# Altium PCB F-T-V Converter PCB.PcbDoc
Units mm, origin at the board's own origin, x right, y up, seen from the top; angles counter-clockwise.
Board outline 25 x 85 mm, 2 copper layers (Top Layer, Bottom Layer); 17 components, 11 nets, 41 pads, 0 vias.
Unrouted connection lines stored in the file: 2.
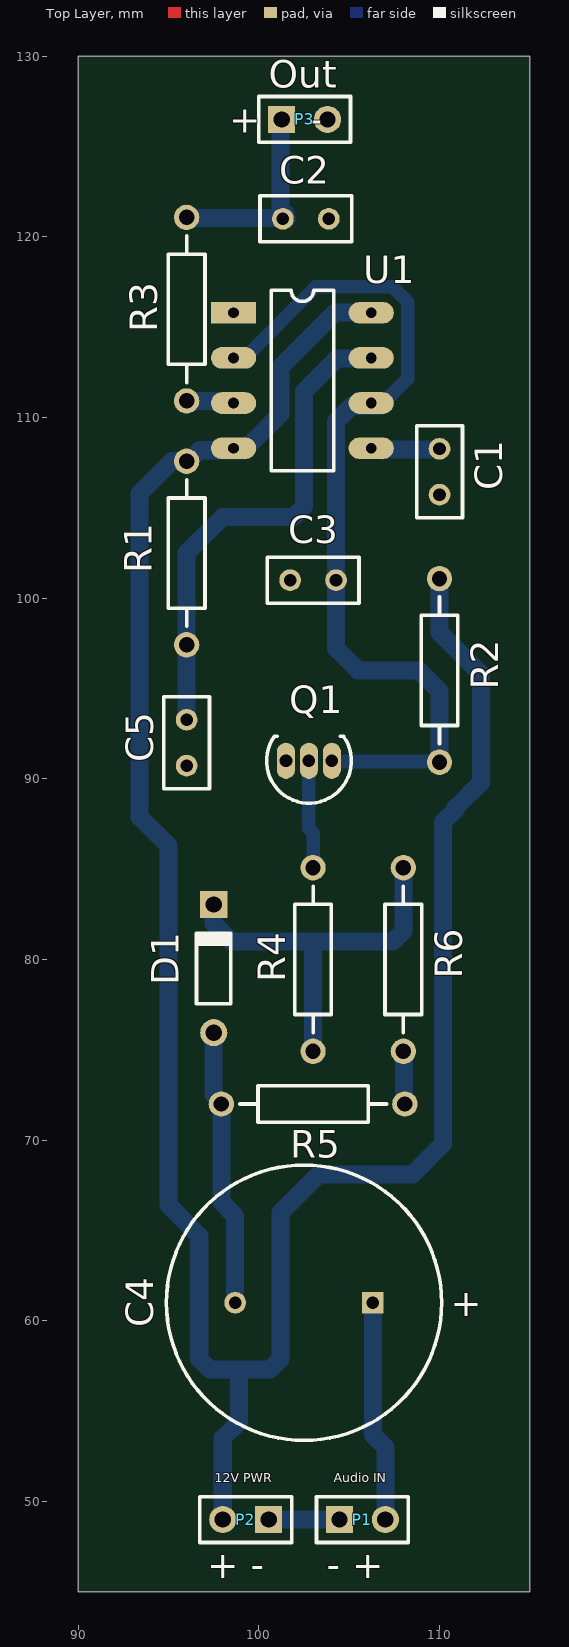
[diagram p0: Top Layer view]
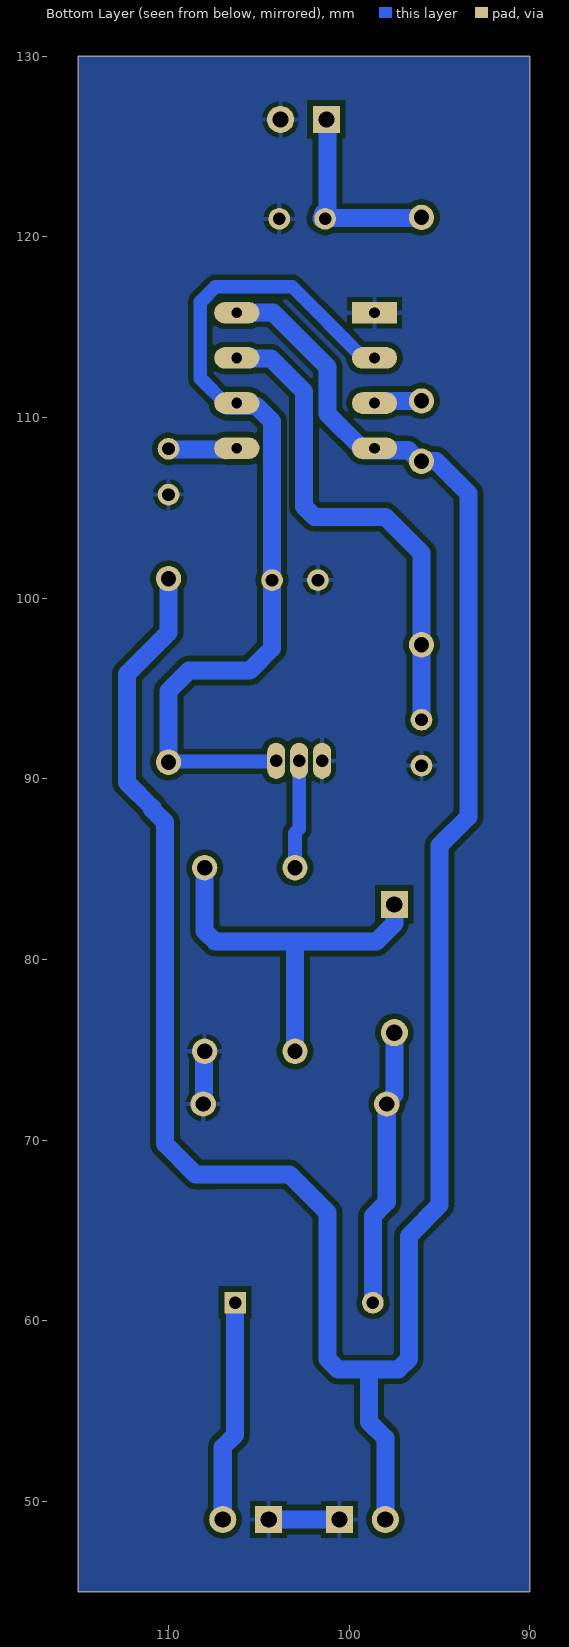
[diagram p1: Bottom Layer view, seen from below]
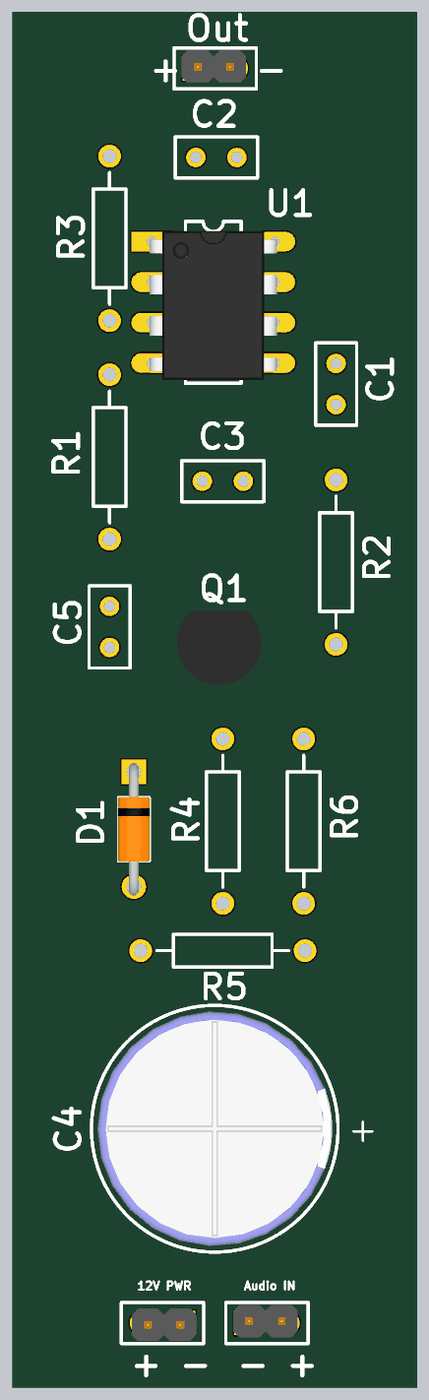
[diagram p2: 3D render of the assembled board from above, using the file's embedded part models]

## Layer stack, top to bottom
Top Solder: solder mask 0.0102, Solder Resist, Dk 3.5
Top Layer: signal copper 0.0356
Dielectric 1: dielectric 0.32, FR-4, Dk 4.8
Bottom Layer: signal copper 0.0356
Bottom Solder: solder mask 0.0102, Solder Resist, Dk 3.5

## Board outline
90,130 115,130 115,45 90,45

## Design rules (kind name [scope] priority, off if disabled: settings)
Clearance [All] p1: gap=0.3 ignorepadtopadclearanceinfootprint=FALSE
PolygonConnect [All] p1: connectstyle=Relief reliefconductorwidth=0.254 reliefentries=4 polygonreliefangle="90 Angle" airgapwidth=0.254
RoutingVias [All] p1: holewidth=0.711 width=1.27 viastyle="Through Hole" minholewidth=0.711 minwidth=1.27 maxholewidth=0.711 maxwidth=1.27
SolderMaskExpansion [All] p1: expansion=0.102 istentingtop=FALSE
Width [All] p1: maxlimit=1.5 minlimit=0.3 preferedwidth=0.6
30 further rules are at their usual default settings.

## Components (designator, comment, footprint, x,y, rotation, side; value= is the part's Value field where it differs from the comment)
C1 "0.01uF" RAD-0.1 110,107 r270 top
C2 "0.022uF" RAD-0.1 102.6,121 r180 top
C3 "0.022uF" RAD-0.1 103,101 r0 top
C4 "47uF" RB7.6-15 102.5,61 r0 top
C5 "0.022uF" RAD-0.1 96,92 r90 top
D1 "1N4148" DO-35 97.5,79.5 r90 top
P1 "Audio" HDR1X2 104.46,49 r0 top
P2 "Power" HDR1X2 100.54,49 r180 top
P3 "Out" HDR1X2 101.26,126.5 r0 top
Q1 "BC337" TO-92 102.77,91 r90 top
R1 "47K" AXIAL-0.4 96,102.5 r90 top
R2 "15K" AXIAL-0.4 110,96 r90 top
R3 "4K7" AXIAL-0.4 96,116 r90 top
R4 "47K" AXIAL-0.4 103,80 r90 top
R5 "1K" AXIAL-0.4 103,72 r180 top
R6 "47K" AXIAL-0.4 108,80 r90 top
U1 "NE555P" NE555 98.6,115.8 r0 top

## Footprints (in the part's own frame and the unit in brackets; to place one, negate y for a bottom-side part, rotate by r counter-clockwise, add the part's x,y. Pads: shape width x height; smd on the part's side, far side on the other; paste and mask are expansions set on the pad)
AXIAL-0.4 [mm] "Axial Device, Thru-Hole; 2 Leads; 0.4 in Pin Spacing"
  round 1.4 hole 0.85: 1(-5.08,0) 2(5.08,0)
  silkscreen extent -4.06,-1.02 4.06,1.02, body extent -5.3,-1.15 5.3,1.15, height 2.5
DO-35 [mm] "Diode, Axial; Body 3.8 x 1.9 mm (LxDia. max), Lead Dia. 0.53 mm (max)"
  round 1.5 hole 0.9: 1(-3.55,0)
  rect 1.5x1.5 hole 0.9: 2(3.55,0)
  silkscreen extent -1.95,-0.95 2.05,0.95, body extent -4.11,-1 4.11,1, height 3
HDR1X2 [mm] "Connector; Header; 2 Position"
  rect 1.5x1.5 hole 0.9: 1(0,0)
  round 1.5 hole 0.9: 2(2.54,0)
  silkscreen extent -1.27,-1.27 3.81,1.27, body extent -0.82,-0.89 3.17,1.11, height 5.5
NE555 [mm]
  rect 2.5x1.2 hole 0.6: 1(0,0)
  oval 2.5x1.2 hole 0.6: 2(0,-2.5) 3(0,-5) 4(0,-7.5) 5(7.62,-7.5) 6(7.62,-5) 7(7.62,-2.5) 8(7.62,0)
  silkscreen extent 2.08,-8.75 5.54,1.25, body extent -0.13,-8.54 7.75,0.67, height 4.6
RAD-0.1 [mm] "Radial Cap, Thru-Hole; 2 Leads; 0.1 in Pin Spacing"
  round 1.2 hole 0.7: 1(-1.27,0) 2(1.27,0)
  silkscreen extent -2.54,-1.27 2.54,1.27, body extent -2.4,-1.36 2.29,1.14, height 11.35
RB7.6-15 [mm] "Polarized Capacitor (Radial); 2 Leads"
  rect 1.2x1.2 hole 0.7: 1(3.81,0)
  round 1.2 hole 0.7: 2(-3.81,0)
  silkscreen extent -7.62,-7.62 7.62,7.62, body extent -7.25,-7.25 7.26,7.25, height 2
TO-92 [mm] "TO, Flat Index; 3 In-Line, Axial Leads; Body Dia. 4.6mm; Leads 0.41 x 0.39 mm (max)"
  oval 2x1 hole 0.7: 1(0,1.27) 2(0,0) 3(0,-1.27)
  silkscreen extent -2.34,-2.34 1.35,2.34, body extent -2.59,-2.62 2.03,2.62, height 8.2

## Part data
C1: library part Cap, "Capacitor: ceramic; MLCC, monolithic; 10nF; 100V; X7R; ±10%; THT", Capacitance=10nF, Case/Package=Radial, Dielectric=X7R, Dielectric Material=Ceramic, Manufacturer=KEMET, Manufacturer Part Number=C315C103K1R5TA, Max Operating Temperature=125°C, Min Operating Temperature=-55°C, Package Quantity=2500, Supplier Part Number 1=399-4147-ND, Tolerance=10%, Voltage=100V, Category="Ceramic Capacitors", ComponentLink1Description=https://datasheet.ciiva.com/11786/0900766b80717e24-11786801.pdf?src-supplier=RSComponents, ComponentLink1URL=https://datasheet.ciiva.com/11786/0900766b80717e24-11786801.pdf?src-supplier=RSComponents, ComponentLink2Description=https://datasheet.ciiva.com/5904/f3101-goldmax-5904939.pdf?src-supplier=Farnell, ComponentLink2URL=https://datasheet.ciiva.com/5904/f3101-goldmax-5904939.pdf?src-supplier=Farnell, ComponentLink3Description=https://datasheet.ciiva.com/18102/getdatasheetpartid-77390-18102811.pdf?src-supplier=Verical, ComponentLink3URL=https://datasheet.ciiva.com/18102/getdatasheetpartid-77390-18102811.pdf?src-supplier=Verical, ComponentLink4Description=https://datasheet.ciiva.com/39122/f3101-goldmax-39122972.pdf?src-supplier=Onlinecomponents.com, ComponentLink4URL=https://datasheet.ciiva.com/39122/f3101-goldmax-39122972.pdf?src-supplier=Onlinecomponents.com, ComponentLink5Description=https://datasheet.ciiva.com/5389/f3101-goldmax-5389838.pdf?src-supplier=Mouser, ComponentLink5URL=https://datasheet.ciiva.com/5389/f3101-goldmax-5389838.pdf?src-supplier=Mouser, Construction=RADIAL, Depth=2.54mm, Dissipation Factor=2.5%, Height=2.54mm, Height - Seated (Max)=0.21inch, LatestRevisionDate=17-Jul-2002, LatestRevisionNote="Re-released for DXP Platform.", Lead Diameter=0.51mm, Lead Free="Lead Free", Lead Length=7mm, Lead Pitch=2.54mm, Lead/Base Style=Straight, Length=3.81mm, Mount="Through Hole,PCB", Number of Pins=2, PackageDescription="Radial Cap, Thru-Hole; 2 Leads; 0.3 in Pin Spacing", PackageReference=RAD-0.3, Packaging=Bulk, Pricing 1="1=0.26000, 10=0.17800, 50=0.11880, 100=0.10100, 500=0.07128, 1000=0.06237, 2500=0.05940, 5000=0.05494 (USD)", Published=8-Jun-2000, Publisher="Altium Limited", Radiation Hardening=No, REACH SVHC="No SVHC", RoHS=Yes, RoHS Compliant=Yes, Series="GoldMax 300 Comm X7R", Stock 1=32763, Supplier 1=Digi-Key, Termination=Radial, Voltage Rating=100V, Voltage Rating (DC)=100V, Width=3.81mm
C2 C3 C5: library part Cap, "Cap Ceramic 0.022uF 50V Z5U 20% Radial 5.08mm 85C T/R", Capacitance=22nF, Case/Package=Radial, Dielectric=Z5U, Manufacturer=KEMET, Manufacturer Part Number=C317C223M5U5TA7301, Max Operating Temperature=85°C, Min Operating Temperature=-10°C, Supplier Part Number 1=399-14073-1-ND, Tolerance=20%, Voltage Rating=50V, Category="Ceramic Capacitors", ComponentLink1Description=https://datasheet.ciiva.com/32431/c052-62-mlcc-series-eng-tds-32431014.pdf?src-supplier=Distrelec, ComponentLink1URL=https://datasheet.ciiva.com/32431/c052-62-mlcc-series-eng-tds-32431014.pdf?src-supplier=Distrelec, LatestRevisionDate=17-Jul-2002, LatestRevisionNote="Re-released for DXP Platform.", Lead Pitch=5.08mm, Lead/Base Style="Formed Leads", Length=3.8mm, Mount="Through Hole", PackageDescription="Radial Cap, Thru-Hole; 2 Leads; 0.3 in Pin Spacing", PackageReference=RAD-0.3, Packaging="Tape and Reel", Pitch=5.08mm, Pricing 1="1=0.37000, 10=0.25100, 50=0.16720, 100=0.14210, 500=0.10032, 1000=0.08778 (USD)", Pricing 2="1=0.82000, 10=0.57700, 50=0.43640, 100=0.38020, 500=0.28160, 1000=0.23936 (USD)", Published=8-Jun-2000, Publisher="Altium Limited", Radiation Hardening=No, RoHS=Yes, RoHS Compliant=Yes, Series="GoldMax 300 Comm Z5U", Stock 1=5732, Stock 2=1856, Supplier 1=Digi-Key, Supplier 2=Digi-Key, Supplier Part Number 2=445-175388-1-ND, Termination=Radial, Width=2.54mm
C4: library part "Cap Pol1", "Cap Aluminum 47uF 16V 20% Radial Aluminum Cylindrical Can 2mm 155mA 5000 hr 105°C Ammo Pack", Case/Package=Radial, Manufacturer=Nichicon, Manufacturer Part Number=UPV1C470MFD1TD, Max Operating Temperature=105°C, Min Operating Temperature=-55°C, Package Quantity=2000, Ripple Current=155mA, Supplier Part Number 1=493-11656-1-ND, Tolerance=20%, Voltage Rating=16V, Capacitance=47uF, Category="Aluminum Electrolytic Capacitors", ComponentLink1Description=https://datasheet.ciiva.com/29544/e-pv-29544776.pdf?src-supplier=Digi-Key, ComponentLink1URL=https://datasheet.ciiva.com/29544/e-pv-29544776.pdf?src-supplier=Digi-Key, ComponentLink2Description=https://datasheet.ciiva.com/29544/e-pv-29544777.pdf?src-supplier=Digi-Key, ComponentLink2URL=https://datasheet.ciiva.com/29544/e-pv-29544777.pdf?src-supplier=Digi-Key, Height - Seated (Max)=0.492inch, Impedance=1.4R, LatestRevisionDate=17-Jul-2002, LatestRevisionNote="Re-released for DXP Platform.", Lead Pitch=0.079inch, Life (Hours)=5000Hour, Mount="Through Hole", PackageDescription="Polarized Capacitor (Radial); 2 Leads", PackageReference=RB7.6-15, Packaging="Tape and Reel", Pricing 1="1=0.47000, 10=0.32800, 50=0.22980, 100=0.19700, 500=0.14776, 1000=0.12477 (USD)", Published=8-Jun-2000, Publisher="Altium Limited", RoHS=Yes, RoHS Compliant=Yes, Stock 1=1934, Supplier 1=Digi-Key
D1: library part "Diode 1N4148", "High Conductance Fast Diode", Code_JEDEC=DO-204-AH, ComponentLink1Description="Manufacturer Link", ComponentLink1URL=http://www.fairchildsemi.com/, ComponentLink2Description=Datasheet, ComponentLink2URL=http://www.fairchildsemi.com/ds/1N%2F1N4148.pdf, DatasheetVersion=1997, LatestRevisionDate=17-Jul-2002, LatestRevisionNote="Re-released for DXP Platform.", PackageDescription="Diode, Axial; Body 3.8 x 1.9 mm (LxDia. max), Lead Dia. 0.53 mm (max)", PackageReference=DO-35, Published=8-Jun-2000, Publisher="Altium Limited"
P1 P2 P3: library part MHDR1X2, "Header, 2-Pin", LatestRevisionDate=17-Jul-2002, LatestRevisionNote="Re-released for DXP Platform.", Publisher="Altium Limited"
Q1: library part NPN, "Trans GP BJT NPN 45V 0.8A 3-Pin TO-92 Bulk", Case/Package=TO-92, Collector Base Voltage (VCBO)=50V, Collector Emitter Breakdown Voltage=45V, Collector Emitter Saturation Voltage=700mV, Current Rating=800mA, Emitter Base Voltage (VEBO)=5V, Frequency=100MHz, Manufacturer="ON Semiconductor / Fairchild", Manufacturer Part Number=BC33725BU, Max Operating Temperature=150°C, Max Power Dissipation=625mW, Min Operating Temperature=-55°C, Package Quantity=1000, Supplier Part Number 1=BC33725BU-ND, Category=BJTs, Code_JEDEC=TO-226-AA, Collector Emitter Voltage (VCEO)=45V, ComponentLink1Description=https://datasheet.ciiva.com/972/bc337-972224.pdf?src-supplier=Digi-Key, ComponentLink1URL=https://datasheet.ciiva.com/972/bc337-972224.pdf?src-supplier=Digi-Key, ComponentLink2Description=https://datasheet.ciiva.com/15138/getdatasheetpartid-60357-15138928.pdf?src-supplier=Verical, ComponentLink2URL=https://datasheet.ciiva.com/15138/getdatasheetpartid-60357-15138928.pdf?src-supplier=Verical, ComponentLink3Description=https://datasheet.ciiva.com/26229/bc338-26229799.pdf?src-supplier=Avnet+Europe, ComponentLink3URL=https://datasheet.ciiva.com/26229/bc338-26229799.pdf?src-supplier=Avnet+Europe, ComponentLink4Description=https://datasheet.ciiva.com/11205/bc338-11205913.pdf?src-supplier=Avnet, ComponentLink4URL=https://datasheet.ciiva.com/11205/bc338-11205913.pdf?src-supplier=Avnet, ComponentLink5Description=https://datasheet.ciiva.com/16918/bc337-16918877.pdf?src-supplier=Future+Electronics, ComponentLink5URL=https://datasheet.ciiva.com/16918/bc337-16918877.pdf?src-supplier=Future+Electronics, Contact Plating=Tin,Matte, Element Configuration=Single, Gain Bandwidth Product=100MHz, Height=4.58mm, hFE Min=100, LatestRevisionDate=17-Jul-2002, LatestRevisionNote="Re-released for DXP Platform.", Lead Free="Lead Free", Length=4.58mm, Max Collector Current=800mA, Max Frequency=100MHz, Mount="Through Hole", Number of Elements=1, Number of Pins=3, PackageDescription="TO, Flat Index; 3 In-Line, Axial Leads; Body Dia. 4.8mm; Leads 0.55 x 0.51 mm (max)", PackageReference=TO-226-AA, Packaging=Bulk, Polarity=NPN, Power Dissipation=625mW, Pricing 1="1=0.32000, 10=0.22000, 25=0.20720, 100=0.10730, 500=0.08948, 1000=0.06217, 2500=0.05388, 5000=0.04998, 9000=0.04145 (USD)", Published=8-Jun-2000, Publisher="Altium Limited", Radiation Hardening=No, REACH SVHC="No SVHC", RoHS=Yes, RoHS Compliant=Yes, Stock 1=7685, Supplier 1=Digi-Key, Transition Frequency=100MHz, Voltage Rating (DC)=45V, Weight=0.179g, Width=3.86mm
R1 R4 R6: library part Res2, "RES 47K OHM 1/4W 5% AXIAL", Case/Package=Conformal, Manufacturer="Stackpole Electronics", Manufacturer Part Number=CF14JT47K0, Max Operating Temperature=155°C, Max Power Dissipation=250mW, Min Operating Temperature=-55°C, Package Quantity=1, Resistance=47kR, Resistor Type="Carbon Film", Supplier Part Number 1=CF14JT47K0CT-ND, Temperature Coefficient=0ppm/°C, Tolerance=5%, Working Voltage=350V, Category="Through-Hole Resistors", ComponentLink1Description=https://www.verical.com/server-webapp/html/getDatasheet?partID=364248&src-supplier=Verical, ComponentLink1URL=https://www.verical.com/server-webapp/html/getDatasheet?partID=364248&src-supplier=Verical, ComponentLink2Description=https://www.seielect.com/catalog/SEI-CF_CFM.pdf?src-supplier=Avnet, ComponentLink2URL=https://www.seielect.com/catalog/SEI-CF_CFM.pdf?src-supplier=Avnet, ComponentLink3Description=http://www.seielect.com/Catalog/SEI-CF_CFM.pdf?src-supplier=Future+Electronics, ComponentLink3URL=http://www.seielect.com/Catalog/SEI-CF_CFM.pdf?src-supplier=Future+Electronics, ComponentLink4Description=https://www.seielect.com/catalog/SEI-Packaging.pdf?src-supplier=Digi-Key, ComponentLink4URL=https://www.seielect.com/catalog/SEI-Packaging.pdf?src-supplier=Digi-Key, ComponentLink5Description=http://components.arrow.com/part/dataview/27620275S9848655N1174?src-supplier=Arrow+Electronics, ComponentLink5URL=http://components.arrow.com/part/dataview/27620275S9848655N1174?src-supplier=Arrow+Electronics, Construction=Cylindrical, Contact Plating=Tin,Matte, Diameter=2.3mm, Features="Flame Retardant Coating", LatestRevisionDate=17-Jul-2002, LatestRevisionNote="Re-released for DXP Platform.", Lead Free="Lead Free", Length=6.5mm, Military Standard=Not, Mount="Through Hole,Axial", Number of Terminations=2, PackageDescription="Axial Device, Thru-Hole; 2 Leads; 0.4 in Pin Spacing", PackageReference=AXIAL-0.4, Packaging="Tape and Reel", Power Rating=250mW, Pricing 1="1=0.10000, 10=0.03600, 25=0.02640, 50=0.02000, 100=0.01480, 250=0.01124, 500=0.00900, 1000=0.00662 (USD)", Published=8-Jun-2000, Publisher="Altium Limited", Radiation Hardening=No, RoHS=Yes, RoHS Compliant=Yes, Series=CF, Stock 1=174171, Supplier 1=Digi-Key, Technology="CARBON FILM", Termination=Axial
R2: library part Res2, "General Type Carbon Film Resistor 15kOhm 1/4W 5% Axial Bulk", Case/Package=Conformal, Manufacturer="Stackpole Electronics", Manufacturer Part Number=CF14JT47K0, Max Operating Temperature=155°C, Max Power Dissipation=250mW, Min Operating Temperature=-55°C, Package Quantity=1, Resistance=47kR, Resistor Type="Carbon Film", Supplier Part Number 1=CF14JT47K0CT-ND, Temperature Coefficient=0ppm/°C, Tolerance=5%, Working Voltage=350V, Category="Through-Hole Resistors", ComponentLink1Description=https://www.verical.com/server-webapp/html/getDatasheet?partID=364248&src-supplier=Verical, ComponentLink1URL=https://www.verical.com/server-webapp/html/getDatasheet?partID=364248&src-supplier=Verical, ComponentLink2Description=https://www.seielect.com/catalog/SEI-CF_CFM.pdf?src-supplier=Avnet, ComponentLink2URL=https://www.seielect.com/catalog/SEI-CF_CFM.pdf?src-supplier=Avnet, ComponentLink3Description=http://www.seielect.com/Catalog/SEI-CF_CFM.pdf?src-supplier=Future+Electronics, ComponentLink3URL=http://www.seielect.com/Catalog/SEI-CF_CFM.pdf?src-supplier=Future+Electronics, ComponentLink4Description=https://www.seielect.com/catalog/SEI-Packaging.pdf?src-supplier=Digi-Key, ComponentLink4URL=https://www.seielect.com/catalog/SEI-Packaging.pdf?src-supplier=Digi-Key, ComponentLink5Description=http://components.arrow.com/part/dataview/27620275S9848655N1174?src-supplier=Arrow+Electronics, ComponentLink5URL=http://components.arrow.com/part/dataview/27620275S9848655N1174?src-supplier=Arrow+Electronics, ComponentLink6Description=http://www.yageo.com/NewPortal/yageodocoutput?fileName=/pdf/throughhole/Yageo_LR_CFR_2013.pdf&src-supplier=Digi-Key, ComponentLink6URL=http://www.yageo.com/NewPortal/yageodocoutput?fileName=/pdf/throughhole/Yageo_LR_CFR_2013.pdf&src-supplier=Digi-Key, Construction=Cylindrical, Contact Plating=Tin,Matte, Diameter=2.3mm, Features="Flame Retardant Coating", LatestRevisionDate=17-Jul-2002, LatestRevisionNote="Re-released for DXP Platform.", Lead Free="Lead Free", Length=6.5mm, Military Standard=Not, Mount="Through Hole,Axial", Number of Terminations=2, PackageDescription="Axial Device, Thru-Hole; 2 Leads; 0.4 in Pin Spacing", PackageReference=AXIAL-0.4, Packaging="Tape and Reel", Power Rating=250mW, Pricing 1="1=0.10000, 10=0.03600, 25=0.02640, 50=0.02000, 100=0.01480, 250=0.01124, 500=0.00900, 1000=0.00662 (USD)", Pricing 2="1=0.10000, 10=0.06700, 25=0.04640, 50=0.03600, 100=0.02580, 250=0.02008, 500=0.01596, 1000=0.01133, 5000=0.00876 (USD)", Published=8-Jun-2000, Publisher="Altium Limited", Radiation Hardening=No, RoHS=Yes, RoHS Compliant=Yes, Series=CF, Stock 1=174171, Stock 2=39195, Supplier 1=Digi-Key, Supplier 2=Digi-Key, Supplier Part Number 2=15KQBK-ND, Technology="CARBON FILM", Termination=Axial
R3: "RES 4.7K OHM 1/4W 5% AXIAL", Case/Package=Conformal, Manufacturer="Stackpole Electronics", Manufacturer Part Number=CF14JT47K0, Max Operating Temperature=155°C, Max Power Dissipation=250mW, Min Operating Temperature=-55°C, Package Quantity=1, Resistance=47kR, Resistor Type="Carbon Film", Supplier Part Number 1=CF14JT47K0CT-ND, Temperature Coefficient=0ppm/°C, Tolerance=5%, Working Voltage=350V, Category="Through-Hole Resistors", ComponentLink1Description=https://www.verical.com/server-webapp/html/getDatasheet?partID=364248&src-supplier=Verical, ComponentLink1URL=https://www.verical.com/server-webapp/html/getDatasheet?partID=364248&src-supplier=Verical, ComponentLink2Description=https://www.seielect.com/catalog/SEI-CF_CFM.pdf?src-supplier=Avnet, ComponentLink2URL=https://www.seielect.com/catalog/SEI-CF_CFM.pdf?src-supplier=Avnet, ComponentLink3Description=http://www.seielect.com/Catalog/SEI-CF_CFM.pdf?src-supplier=Future+Electronics, ComponentLink3URL=http://www.seielect.com/Catalog/SEI-CF_CFM.pdf?src-supplier=Future+Electronics, ComponentLink4Description=https://www.seielect.com/catalog/SEI-Packaging.pdf?src-supplier=Digi-Key, ComponentLink4URL=https://www.seielect.com/catalog/SEI-Packaging.pdf?src-supplier=Digi-Key, ComponentLink5Description=http://components.arrow.com/part/dataview/27620275S9848655N1174?src-supplier=Arrow+Electronics, ComponentLink5URL=http://components.arrow.com/part/dataview/27620275S9848655N1174?src-supplier=Arrow+Electronics, ComponentLink6Description=https://datasheet.ciiva.com/15215/getdatasheetpartid-360405-15215963.pdf?src-supplier=Verical, ComponentLink6URL=https://datasheet.ciiva.com/15215/getdatasheetpartid-360405-15215963.pdf?src-supplier=Verical, Construction=Cylindrical, Contact Plating=Tin,Matte, Diameter=2.3mm, Features="Flame Retardant Coating", LatestRevisionDate=17-Jul-2002, LatestRevisionNote="Re-released for DXP Platform.", Lead Free="Lead Free", Length=6.5mm, Military Standard=Not, Mount="Through Hole,Axial", Number of Terminations=2, PackageDescription="Axial Device, Thru-Hole; 2 Leads; 0.4 in Pin Spacing", PackageReference=AXIAL-0.4, Packaging="Tape and Reel", Power Rating=250mW, Pricing 1="1=0.10000, 10=0.03600, 25=0.02640, 50=0.02000, 100=0.01480, 250=0.01124, 500=0.00900, 1000=0.00662 (USD)", Pricing 2="1=0.10000, 10=0.03600, 25=0.02640, 50=0.02000, 100=0.01480, 250=0.01124, 500=0.00900, 1000=0.00662 (USD)", Published=8-Jun-2000, Publisher="Altium Limited", Radiation Hardening=No, RoHS=Yes, RoHS Compliant=Yes, Series=CF, Stock 1=174171, Stock 2=247552, Supplier 1=Digi-Key, Supplier 2=Digi-Key, Supplier Part Number 2=CF14JT4K70CT-ND, Technology="CARBON FILM", Termination=Axial
R5: library part Res2, "TE Connectivity CFR16 Series Axial Carbon Film Resistor 1k 5% 0.25W -1200  0ppm/C", Case/Package=Axial, Manufacturer="TE Connectivity", Manufacturer Part Number=CFR16J1K0, Max Operating Temperature=155°C, Max Power Dissipation=250mW, Min Operating Temperature=-55°C, Number of Resistors=1, Resistance=1kR, Resistance Tolerance=5%, Resistor Type="Thin Film", Supplier Part Number 1=A104669CT-ND, Temperature Coefficient=0ppm/°C, Voltage Rating=200V, Category="Through-Hole Resistors", ComponentLink1Description=https://datasheet.ciiva.com/11823/0900766b80098b49-11823166.pdf?src-supplier=RSComponents, ComponentLink1URL=https://datasheet.ciiva.com/11823/0900766b80098b49-11823166.pdf?src-supplier=RSComponents, ComponentLink2Description=https://datasheet.ciiva.com/24428/eng-ds-1773195-d-24428424.pdf?src-supplier=Onlinecomponents.com, ComponentLink2URL=https://datasheet.ciiva.com/24428/eng-ds-1773195-d-24428424.pdf?src-supplier=Onlinecomponents.com, ComponentLink3Description=https://datasheet.ciiva.com/22664/1723854-22664943.pdf?src-supplier=Element14, ComponentLink3URL=https://datasheet.ciiva.com/22664/1723854-22664943.pdf?src-supplier=Element14, Diameter=1.85mm, ELV=Compliant, LatestRevisionDate=17-Jul-2002, LatestRevisionNote="Re-released for DXP Platform.", Length=3.5mm, Mount=Axial, Number of Terminations=2, PackageDescription="Axial Device, Thru-Hole; 2 Leads; 0.4 in Pin Spacing", PackageReference=AXIAL-0.4, Packaging="Cut Tape", Power Rating=250mW, Pricing 1="1=0.10000, 10=0.06700, 25=0.04640, 50=0.03600, 100=0.02580, 250=0.02008, 500=0.01596, 1000=0.01133 (USD)", Published=8-Jun-2000, Publisher="Altium Limited", Radiation Hardening=No, REACH SVHC="No SVHC", RoHS=Yes, RoHS Compliant=Yes, Series="CFR16, Neohm", Stock 1=11766, Supplier 1=Digi-Key, Technology="CARBON FILM", Termination=Axial, Tolerance=5%, Voltage Rating (DC)=200V
U1: "Standard Timer Single 8-Pin PDIP Tube", Case/Package=PDIP, Current Rating=10mA, Frequency=500kHz, High Level Output Current=-200mA, Low Level Output Current=200mA, Manufacturer="Texas Instruments", Max Operating Temperature=70°C, Max Supply Voltage=16V, Min Operating Temperature=0°C, Min Supply Voltage=4.5V, Nominal Supply Current=2mA, Operating Supply Voltage=5V, Package Quantity=50, Quiescent Current=15mA, Supplier Part Number 1=595-NE555P, Category="Clock and Timing", ComponentLink1Description=https://datasheet.ciiva.com/1139/sa555-1139904.pdf?src-supplier=Element14, ComponentLink1URL=https://datasheet.ciiva.com/1139/sa555-1139904.pdf?src-supplier=Element14, ComponentLink2Description=https://datasheet.ciiva.com/19457/904085-19457361.pdf?src-supplier=Jameco, ComponentLink2URL=https://datasheet.ciiva.com/19457/904085-19457361.pdf?src-supplier=Jameco, ComponentLink3Description=https://datasheet.ciiva.com/26325/152184-da-01-en-ne555p-timer-tid-26325915.pdf?src-supplier=Conrad, ComponentLink3URL=https://datasheet.ciiva.com/26325/152184-da-01-en-ne555p-timer-tid-26325915.pdf?src-supplier=Conrad, ComponentLink4Description=https://datasheet.ciiva.com/1147/1764032-1147750.pdf?src-supplier=Newark, ComponentLink4URL=https://datasheet.ciiva.com/1147/1764032-1147750.pdf?src-supplier=Newark, ComponentLink5Description=https://datasheet.ciiva.com/14094/ne555-series-eng-tds-14094950.pdf?src-supplier=Distrelec, ComponentLink5URL=https://datasheet.ciiva.com/14094/ne555-series-eng-tds-14094950.pdf?src-supplier=Distrelec, ComponentLink6Description=https://datasheet.ciiva.com/14274/ne555-14274456.pdf?src-supplier=Avnet, ComponentLink6URL=https://datasheet.ciiva.com/14274/ne555-14274456.pdf?src-supplier=Avnet, ComponentLink7Description=https://datasheet.ciiva.com/15152/getdatasheetpartid-248510-15152620.pdf?src-supplier=Verical, ComponentLink7URL=https://datasheet.ciiva.com/15152/getdatasheetpartid-248510-15152620.pdf?src-supplier=Verical, ComponentLink8Description=https://datasheet.ciiva.com/1233/ne555-1233454.pdf?src-supplier=Digi-Key, ComponentLink8URL=https://datasheet.ciiva.com/1233/ne555-1233454.pdf?src-supplier=Digi-Key, ComponentLink9Description=https://datasheet.ciiva.com/26228/ne555-26228892.pdf?src-supplier=Avnet+Europe, ComponentLink9URL=https://datasheet.ciiva.com/26228/ne555-26228892.pdf?src-supplier=Avnet+Europe, Contact Plating=Gold, Height=4.57mm, Lead Free="Lead Free", Length=9.81mm, Manufacturer Part Number=NE555P, Mount="Through Hole", Number of Pins=8, Number of Timers/Counters=1, Operating Supply Current=10mA, Packaging=Rail/Tube, Pricing 1="1=0.37000, 10=0.29900, 50=0.29900, 100=0.20300, 1000=0.11400, 10000=0.09800 (USD)", Radiation Hardening=No, REACH SVHC="No SVHC", RoHS=Yes, RoHS Compliant=Yes, Stock 1=1667, Supplier 1=Mouser, Weight=0.015535oz, Width=6.35mm

## Nets (pads, with @x,y where several pads share a name; then routed paths per layer and width w, separated by ;. In a path a pad name is that pad's centre, name@x,y a point inside that pad or via, vN(x,y) a via of type N, cw(c..) or ccw(c..) an arc to the next point about the centre after c; other vN are vias at no path point)
+12: P2.2 R1.2 R2.2 U1.4 U1.8 | length 133.9
  Bottom Layer w1: P2.2 98,53.5 98.9,54.4 98.9,57.2 99,57.3 ; U1.8@106.81,115.81 104.21,115.81 101.2,112.8 101.2,110.2 99.19,108.19 96.718,108.19 96.108,107.58 R1.2 95.98,107.6 95.2,107.6 93.4,105.8 93.4,87.9 95,86.3 95,66.4 96.7,64.7 96.7,57.886 97.286,57.3 98,57.3 99,57.3 ; R2.2 110,98.1 112.3,95.8 112.3,89.8 110.9,88.4 110.9,88.3 110.2,87.6 110.2,69.8 108.5,68.1 107.4,68.1 103.3,68.1 101.2,66 101.2,57.886 100.614,57.3 99,57.3
GND: C1.2 C2.1 C3.1 C5.1 P1.1 P2.1 P3.2 Q1.3 R5.1 R6.1 U1.1 | length 7
  Bottom Layer w0.75: C3.1@101.73,100.878 C3.1
  Bottom Layer w1: P2.1 P1.1 ; R6.1 108.04,74.88 108.04,72.04 R5.1
NetC1_1: C1.1 U1.5 | length 3.2
  Bottom Layer w1: U1.5@106.81,108.19 106.852,108.232 109.962,108.232 C1.1
NetC2_2: C2.2 P3.1 R3.2 | length 11.3
  Bottom Layer w1: R3.2 96.042,121.038 101.192,121.038 101.23,121 101.23,121.054 C2.2@101.46,121.284 ; P3.1 101.2,126.44 101.2,121.384 101.53,121.054 C2.2@101.53,121
NetC3_2: C3.2 Q1.1 R2.1 U1.2 U1.6 | length 49.4
  Bottom Layer w0.75: U1.2@99.19,113.27 103.155,117.235 107.4,117.235 108.235,116.4 108.235,112.155 U1.6@106.81,110.73 ; 104.04,91 104.08,90.96 109.96,90.96 R2.1
  Bottom Layer w1: U1.6@106.81,110.73 106.714,110.634 105.134,110.634 104.27,109.77 C3.2 104.27,97.23 105.5,96 108.859,96 110,94.859 R2.1
NetC4_1: C4.1 P1.2 | length 12.3
  Bottom Layer w1: C4.1 106.31,53.69 107,53 P1.2
NetC4_2: C4.2 D1.1 R5.2 | length 15.4
  Bottom Layer w1: D1.1 97.5,72.528 97.92,72.108 R5.2 97.92,66.58 98.69,65.81 C4.2
NetC5_2: C5.2 R1.1 U1.7 | length 28.2
  Bottom Layer w1: C5.2 R1.1 96,102.5 98,104.5 101.914,104.5 102.5,105.086 102.5,111.448 104.322,113.27 U1.7@106.81,113.27
NetD1_2: D1.2 R4.1 R6.2 | length 21.8
  Bottom Layer w1: D1.2 97.5,82 98.5,81 103,81 ; R4.1 103,81 ; R6.2 108,81.586 107.414,81 103,81
NetQ1_2: Q1.2 R4.2 | length 6
  Bottom Layer w0.75: Q1.2 102.77,87.23 103,87 R4.2
NetR3_1: R3.1 U1.3 | length 3.3
  Bottom Layer w1: R3.1 98.865,110.92 99.055,110.73 U1.3@99.19,110.73

## Polygon pours and split planes (outlines as drawn)
GND on Bottom Layer "GND_L02_P000" (solid, pour order 0): 90,130 115,130 115,45 90,45

## Silkscreen, mask and mechanical layers (free items; w line width, h text height)
Top Overlay:
  text "Out" at 100.554,128.254 h1.52
  text "+    -" at 98.354,125.754 h1.52
  text "12V PWR" at 97.554,51.054 h0.5
  text "Audio IN" at 104.154,51.054 h0.5
  text "+ -" at 97.154,45.754 h1.52
  text "- +" at 103.754,45.754 h1.52

## Text inside footprints (layer, text, board x,y; h text height)
C4: Top Overlay "+" at 110.632,60.263 h1.5